# Altium PCB PCB1.PcbDoc
Units mm, origin at the board's own origin, x right, y up, seen from the top; angles counter-clockwise.
Board outline 51.75 x 40 mm, 2 copper layers (Top Layer, Bottom Layer); 26 components, 70 nets, 248 pads, 116 vias.
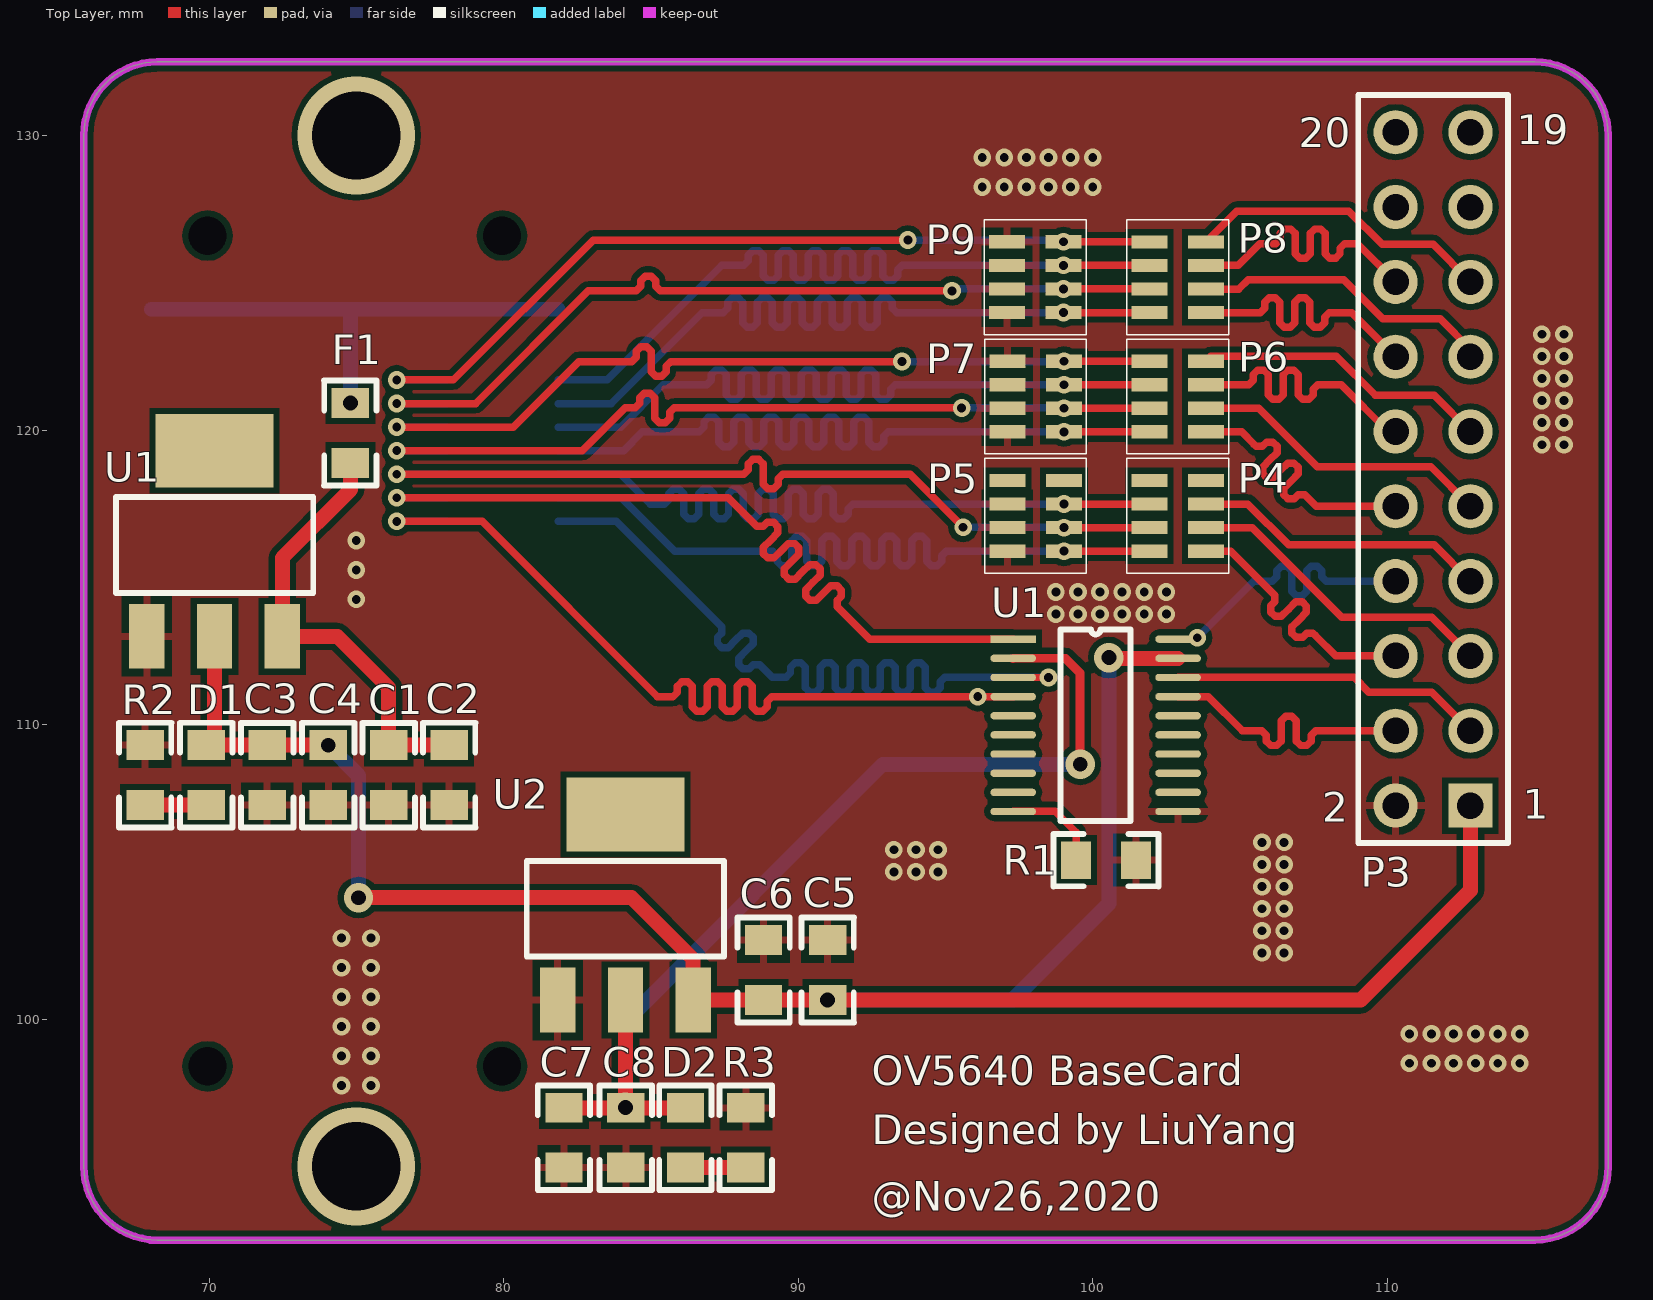
[diagram p0: Top Layer view]
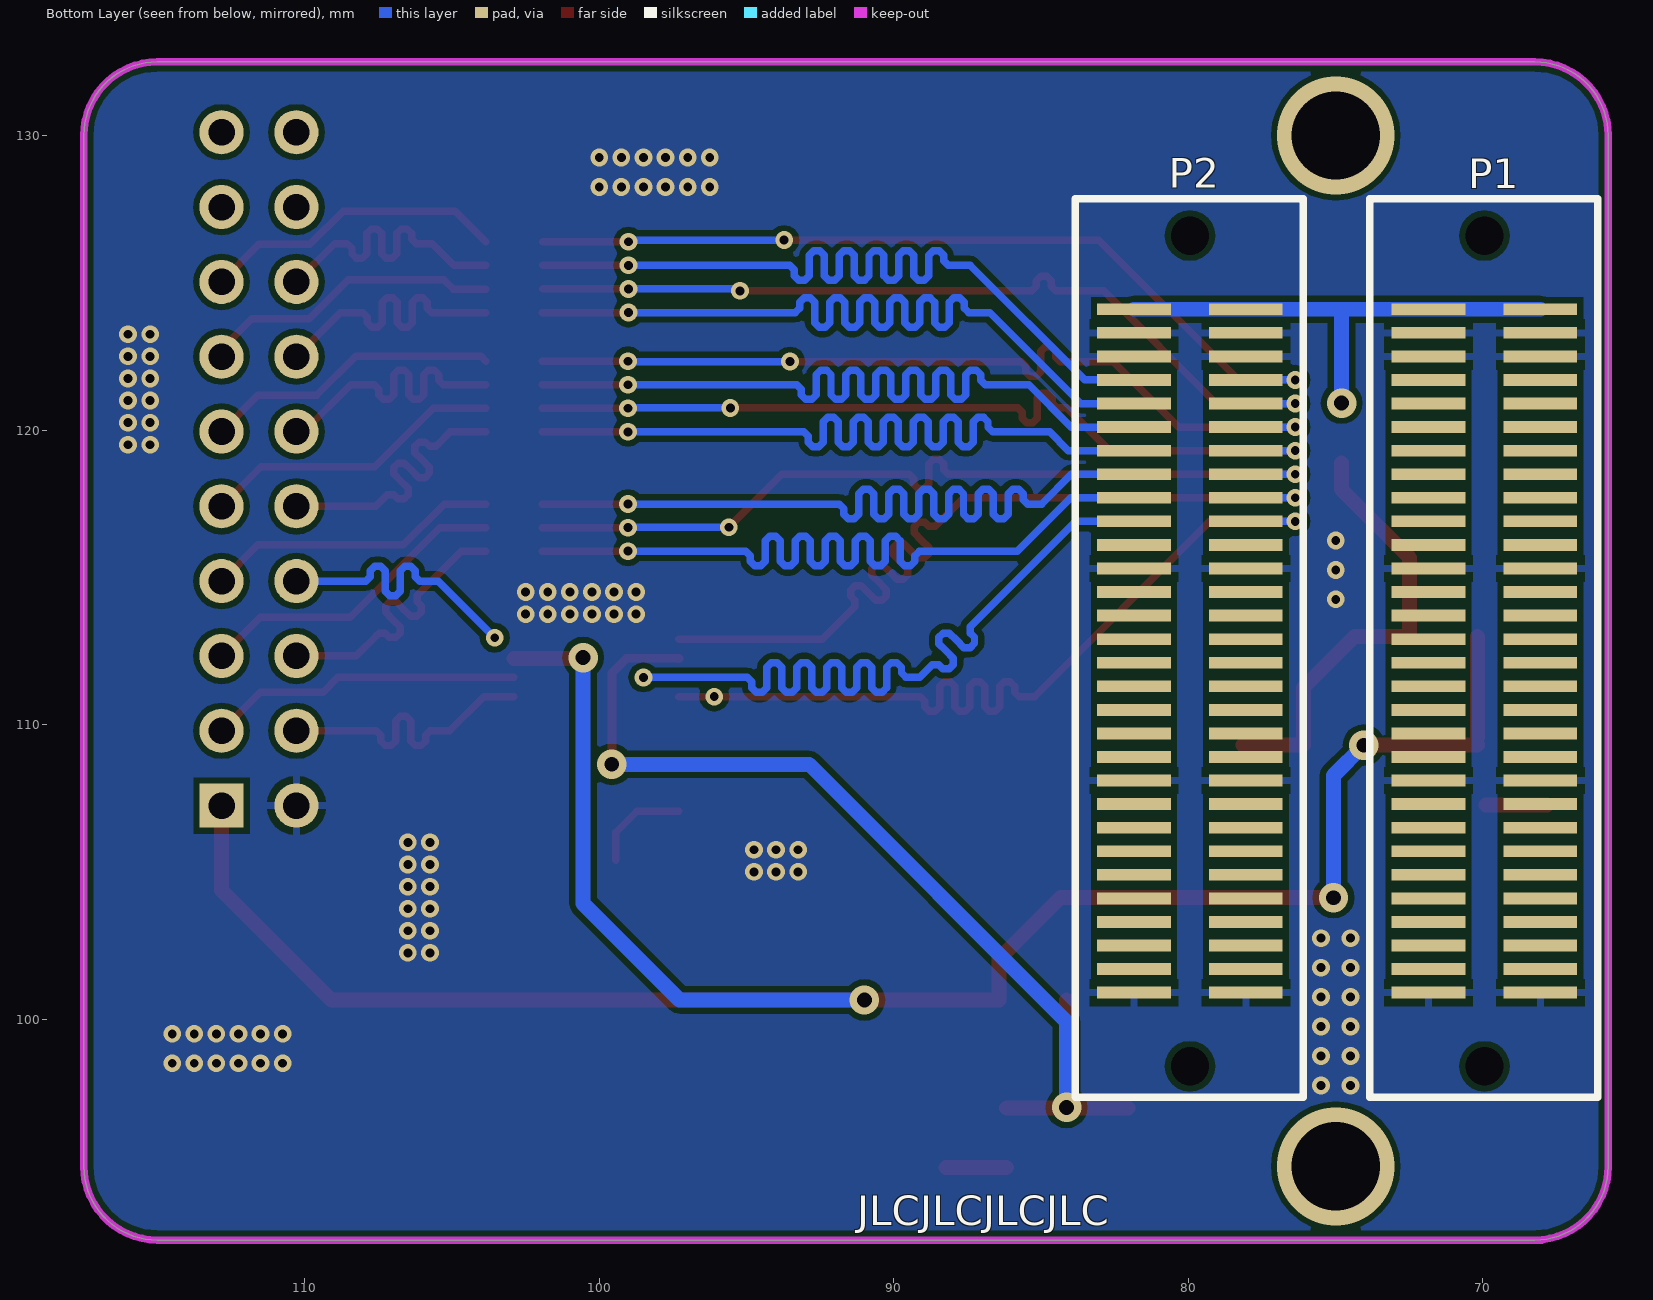
[diagram p1: Bottom Layer view, seen from below]
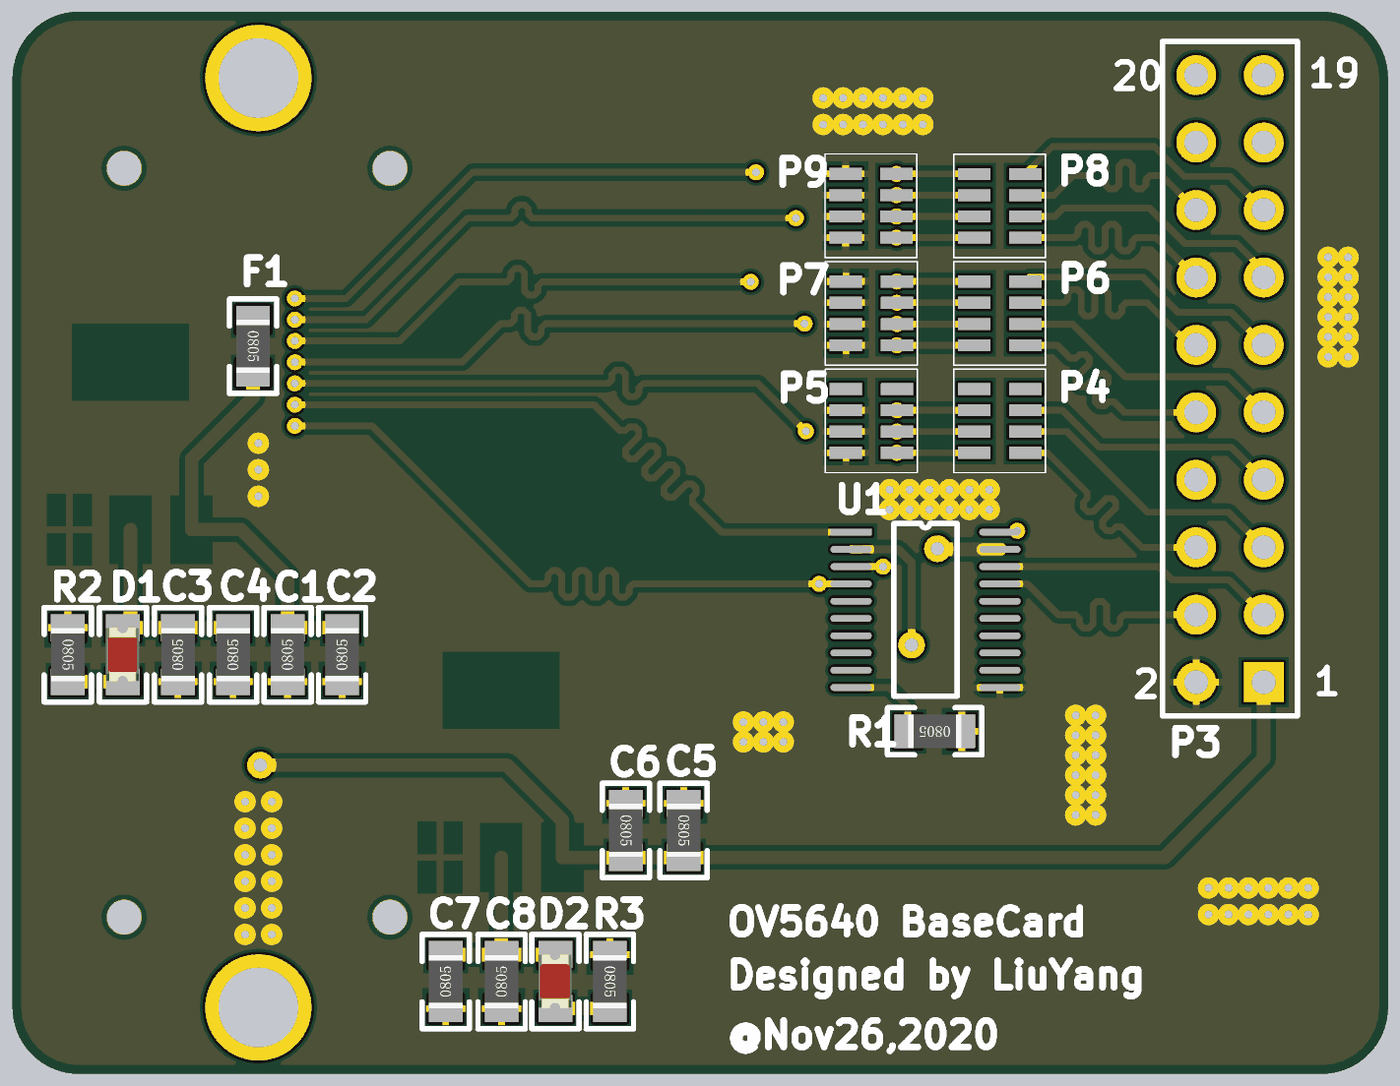
[diagram p2: 3D render of the assembled board from above, using the file's embedded part models]

## Layer stack, top to bottom
Top Solder: solder mask 0.0102, Solder Resist, Dk 3.5
Top Layer: signal copper 0.0356
Dielectric 1: dielectric 0.32, FR-4, Dk 4.8
Bottom Layer: signal copper 0.0356
Bottom Solder: solder mask 0.0102, Solder Resist, Dk 3.5

## Board outline
68.25,92.5 cw(c68.25,95) 65.75,95 65.75,130 cw(c68.25,130) 68.25,132.5 115,132.5 cw(c115,130) 117.5,130 117.5,95 cw(c115,95) 115,92.5

## Design rules (kind name [scope] priority, off if disabled: settings)
Clearance [All] p1: gap=0.2
Length Length_1 [InNetClass('Class2')] p1: maxlimit=31 minlimit=30
Length [InNetClass('Class1')] p2: maxlimit=11 minlimit=10
PolygonConnect [All] p1: connectstyle=Relief reliefconductorwidth=0.254 reliefentries=4 polygonreliefangle="90 Angle" airgapwidth=0.254
RoutingVias [All] p1: holewidth=0.3 width=0.6 viastyle="Through Hole" minholewidth=0.3 minwidth=0.6 maxholewidth=0.711 maxwidth=1.27
SolderMaskExpansion [All] p1: expansion=0.102
Width [All] p1: maxlimit=200 minlimit=0.2 preferedwidth=0.254
30 further rules are at their usual default settings.

## Components (designator, comment, footprint, x,y, rotation, side; value= is the part's Value field where it differs from the comment)
C1 "Cap" R0805 76.1,108.284 r90 top
C2 "Cap" R0805 78.15,108.284 r90 top
C3 "Cap" R0805 71.975,108.284 r90 top
C4 "Cap" R0805 74.05,108.284 r90 top
C5 "Cap" R0805 91,101.666 r270 top
C6 "Cap" R0805 88.825,101.666 r270 top
C7 "Cap" R0805 82.05,95.975 r90 top
C8 "Cap" R0805 84.15,95.975 r90 top
D1 "LED0" LED0805红 69.905,108.284 r270 top
D2 "LED0" LED0805红 86.175,95.975 r270 top
F1 "Fuse 1" R0805 74.8,119.9 r270 top
P1 "BTB" BTBCON_0.8mm_60P 71.85,124.1 r180 bottom locked
P2 "BTB" BTBCON_0.8mm_60P 81.85,124.1 r180 bottom locked
P3 "OV5640" HDR2X10 112.825,107.25 r90 top locked
P4 "Res 10K" 排阻(4位贴片) 103.8,115.9 r180 top
P5 "Res 12K" 排阻(4位贴片) 98.975,115.9 r180 top
P6 "Res 10K" 排阻(4位贴片) 103.8,119.95 r180 top
P7 "Res 12K" 排阻(4位贴片) 98.975,119.95 r180 top
P8 "Res 10K" 排阻(4位贴片) 103.8,124 r180 top
P9 "Res 12K" 排阻(4位贴片) 98.961,124.002 r180 top
R1 "Res Semi" R0805 100.45,105.4 r180 top
R2 "Res1" R0805 67.83,108.284 r270 top
R3 "Res1" R0805 88.225,95.975 r270 top
U1 "AMS1117-3V3" AMS1117 1294.9,1365.725 r0 top (schematic designator VR1)
U1 "TXB0108" TXB0108 97.3,112.9 r0 top
U2 "AMS1117-1V8" AMS1117 1308.85,1353.375 r0 top (schematic designator VR2)

## Footprints (in the part's own frame and the unit in brackets; to place one, negate y for a bottom-side part, rotate by r counter-clockwise, add the part's x,y. Pads: shape width x height; smd on the part's side, far side on the other; paste and mask are expansions set on the pad)
AMS1117 [mm]
  rect 1.2x2.2 smd: 1(-1227.012,-1252.729) 2(-1224.712,-1252.729) 3(-1222.412,-1252.729)
  rect 4x2.5 smd: 4(-1224.712,-1246.429)
  silkscreen extent -1228.06,-1251.25 -1221.36,-1248, body extent -1227.99,-1253.24 -1221.49,-1246.28, height 1.7
BTBCON_0.8mm_60P [mm]
  rect 2.5x0.4 smd: 1(0,0) 2(3.8,0) 3(0,-0.8) 4(3.8,-0.8) 5(0,-1.6) 6(3.8,-1.6) 7(0,-2.4) 8(3.8,-2.4) 9(0,-3.2) 10(3.8,-3.2) 11(0,-4) 12(3.8,-4) 13(0,-4.8) 14(3.8,-4.8) 15(0,-5.6) 16(3.8,-5.6) 17(0,-6.4) 18(3.8,-6.4) 19(0,-7.2) 20(3.8,-7.2) 21(0,-8) 22(3.8,-8) 23(0,-8.8) 24(3.8,-8.8) 25(0,-9.6) 26(3.8,-9.6) 27(0,-10.4) 28(3.8,-10.4) 29(0,-11.2) 30(3.8,-11.2) 31(0,-12) 32(3.8,-12) 33(0,-12.8) 34(3.8,-12.8) 35(0,-13.6) 36(3.8,-13.6) 37(0,-14.4) 38(3.8,-14.4) 39(0,-15.2) 40(3.8,-15.2) 41(0,-16) 42(3.8,-16) 43(0,-16.8) 44(3.8,-16.8) 45(0,-17.6) 46(3.8,-17.6) 47(0,-18.4) 48(3.8,-18.4) 49(0,-19.2) 50(3.8,-19.2) 51(0,-20) 52(3.8,-20) 53(0,-20.8) 54(3.8,-20.8) 55(0,-21.6) 56(3.8,-21.6) 57(0,-22.4) 58(3.8,-22.4) 59(0,-23.2) 60(3.8,-23.2)
  round 1 hole 1.3: 61(1.9,2.5) 62(1.9,-25.7)
  silkscreen extent -2,-26.75 5.75,3.75
HDR2X10 [mm] "Connector; Header; 10x2 Position"
  rect 1.5x1.5 hole 0.9: 1(0,0)
  round 1.5 hole 0.9: 2(0,2.54) 3(2.54,0) 4(2.54,2.54) 5(5.08,0) 6(5.08,2.54) 7(7.62,0) 8(7.62,2.54) 9(10.16,0) 10(10.16,2.54) 11(12.7,0) 12(12.7,2.54) 13(15.24,0) 14(15.24,2.54) 15(17.78,0) 16(17.78,2.54) 17(20.32,0) 18(20.32,2.54) 19(22.86,0) 20(22.86,2.54)
  silkscreen extent -1.27,-1.27 24.13,3.81
LED0805红 [mil]
  rect 40x50 smd: 1(-40,0) 2(40,0)
  silkscreen extent -70,-35 70,35, body extent -40,-25 40,24, height 43
R0805 [mil]
  rect 40x50 smd: 1(-40,0) 2(40,0)
  silkscreen extent -70,-35 70,35, body extent -39,-25 39,25, height 22
TXB0108 [mm]
  rect 1.55x0.25 smd: 1(0,0)
  oval 1.55x0.25 smd: 2(0,-0.65) 3(0,-1.3) 4(0,-1.95) 5(0,-2.6) 6(0,-3.25) 7(0,-3.9) 8(0,-4.55) 9(0,-5.2) 10(0,-5.85) 11(5.6,-5.85) 12(5.6,-5.2) 13(5.6,-4.55) 14(5.6,-3.9) 15(5.6,-3.25) 16(5.6,-2.6) 17(5.6,-1.95) 18(5.6,-1.3) 19(5.6,-0.65) 20(5.6,0)
  silkscreen extent 1.61,-6.18 3.99,0.33
排阻(4位贴片) [mm]
  rect 1.22x0.45 smd: 1(-0.051,0.013) 2(1.869,0.013) 3(-0.051,-0.787) 4(1.869,-0.787) 5(-0.051,-1.587) 6(1.869,-1.587) 7(-0.051,-2.387) 8(1.869,-2.387)
  silkscreen extent -0.81,-3.14 2.64,0.76, body extent 0.1,-2.79 1.7,0.41, height 0.59

## Part data
C1 C2 C3 C4 C5 C6 C7 C8: "Capacitor"
D1 D2: "Typical INFRARED GaAs LED"
F1: "Fuse"
P1 P2: library part "Header 30X2", "Header, 30-Pin, Dual row"
P3: library part "Header 10X2", "Header, 10-Pin, Dual row"
P4 P5 P6 P7 P8 P9: library part "Header 4X2", "Header, 4-Pin, Dual row"
R1: "Semiconductor Resistor"
R2 R3: "Resistor"
U1 U2: library part "Volt Reg", "Voltage Regulator"

## Via types
v1: diameter 0.6, hole 0.3, Top Layer to Bottom Layer, 107 vias
v2: diameter 1, hole 0.5, Top Layer to Bottom Layer, 7 vias
v3: diameter 4, hole 3, Top Layer to Bottom Layer, 2 vias

## Nets (pads, with @x,y where several pads share a name; then routed paths per layer and width w, separated by ;. In a path a pad name is that pad's centre, name@x,y a point inside that pad or via, vN(x,y) a via of type N, cw(c..) or ccw(c..) an arc to the next point about the centre after c; other vN are vias at no path point)
1V8: C7.2 C8.2 D2.1 U1.2@97.3,112.25 U2.2 | length 35.3
  Top Layer w0.305: U1.2@97.3,112.25 97.3,112.252 99.073,112.252 99.575,111.75 v2(99.575,108.65)
  Top Layer w0.508: C7.2 C8.2 ; U2.2 v2(84.138,97.003) C8.2 ; D2.1 C8.2
  Bottom Layer w0.508: v2(84.138,97.003) 84.138,99.913 92.875,108.65 v2(99.575,108.65)
3V3: C3.2 C4.2 C5.2 C6.2 D1.1 P3.1 U1.2@70.188,112.996 U1.19 U2.3 | length 79.1
  Top Layer w0.508: D1.1@70.188,109.3 v2(74.05,109.3) ; D1.1@70.188,109.583 U1.2@70.188,112.996 ; v2(75.075,104.125) 84.35,104.125 86.438,102.037 U2.3 88.821,100.646 C6.2 v2(91,100.65) 109.1,100.65 112.825,104.375 P3.1 ; v2(100.55,112.275) 100.5,112.275 100.475,112.25 U1.19
  Bottom Layer w0.508: v2(74.05,109.3) 75.075,108.275 v2(75.075,104.125) ; v2(91,100.65) 97.275,100.65 100.55,103.925 v2(100.55,112.275)
5V: F1.1 P1.1 P1.2 P2.1 P2.2 | length 17
  Bottom Layer w0.508: P1.2 P1.1 74.825,124.1 ; v2(74.8,120.916) 74.8,124.075 74.825,124.1 ; P2.1 P2.2 74.825,124.1
A12: P2.46
A13: P2.44
A14: P2.39
A15: P2.37
A16: P2.18 U1.1@97.3,112.9 | length 30.2
  Top Layer w0.254: v1(76.373,117.7) 87.625,117.7 88.525,116.8 88.597,116.728 88.812,116.728 88.95,116.866 89.166,116.866 89.31,116.722 89.31,116.507 89.064,116.261 88.818,116.015 88.818,115.8 88.962,115.656 89.177,115.656 89.423,115.902 89.669,116.148 89.884,116.148 90.028,116.004 90.028,115.789 89.782,115.543 89.536,115.297 89.536,115.081 89.68,114.938 89.896,114.938 90.141,115.184 90.387,115.429 90.603,115.429 90.746,115.286 90.746,115.07 90.501,114.824 90.255,114.579 90.255,114.363 90.399,114.219 90.614,114.219 90.86,114.465 91.106,114.711 91.321,114.711 91.465,114.567 91.465,114.352 91.327,114.214 91.327,113.998 91.5,113.825 92.425,112.9 U1.1@97.3,112.9
  Bottom Layer w0.254: v1(76.373,117.7) 76.595,117.7 P2.18
A17: P2.16 P4.4 P5.3 | length 29.4
  Top Layer w0.254: v1(76.373,118.5) 88.05,118.5 88.152,118.5 88.304,118.652 88.304,118.848 88.456,119 88.66,119 88.812,118.848 88.812,118.5 88.812,118.152 88.964,118 89.168,118 89.32,118.152 89.32,118.348 89.472,118.5 89.675,118.5 93.8,118.5 v1(95.6,116.7) ; v1(99.026,116.687) P4.4
  Bottom Layer w0.254: v1(76.373,118.5) 76.595,118.5 P2.16 ; v1(95.6,116.7) 99.013,116.7 v1(99.026,116.687)
B13: P2.45
B14: P2.43
B15: P2.36
B16: P2.34
C12: P2.40
C13: P2.38
C16: P2.32
C17: P2.28
D0: P3.16 P8.5 | length 10.4
  Top Layer w0.254: P8.5 104.937,125.587 105.675,126.325 106.1,126.325 106.212,126.325 106.364,126.477 106.364,126.673 106.516,126.825 106.72,126.825 106.872,126.673 106.872,126.325 106.872,125.977 107.024,125.825 107.228,125.825 107.38,125.977 107.38,126.325 107.38,126.673 107.532,126.825 107.736,126.825 107.888,126.673 107.888,126.325 107.888,125.977 108.04,125.825 108.244,125.825 108.396,125.977 108.396,126.173 108.548,126.325 108.65,126.325 108.99,126.325 P3.16
D1: P3.15 P8.7 | length 10.4
  Top Layer w0.254: P8.7 104.888,127.425 108.7,127.425 109.825,126.3 111.555,126.3 P3.15
D2: P3.14 P8.1 | length 10.2
  Top Layer w0.254: P8.1 105.45,123.987 105.687,123.987 105.839,124.14 105.839,124.335 105.991,124.487 106.195,124.487 106.347,124.335 106.347,123.987 106.347,123.64 106.499,123.487 106.703,123.487 106.855,123.64 106.855,123.987 106.855,124.335 107.007,124.487 107.211,124.487 107.363,124.335 107.363,123.987 107.363,123.64 107.515,123.487 107.719,123.487 107.871,123.64 107.871,123.835 108.023,123.987 108.125,123.987 108.788,123.987 P3.14
D3: P3.13 P8.3 | length 10.3
  Top Layer w0.254: P8.3 104.962,124.787 105.275,125.1 108.525,125.1 109.85,123.775 111.8,123.775 112.825,122.75 P3.13
D4: P3.12 P6.5 | length 10.2
  Top Layer w0.254: P6.5 105.2,121.537 105.302,121.537 105.454,121.69 105.454,121.885 105.606,122.037 105.81,122.037 105.962,121.885 105.962,121.537 105.962,121.19 106.114,121.037 106.318,121.037 106.47,121.19 106.47,121.537 106.47,121.885 106.622,122.037 106.826,122.037 106.978,121.885 106.978,121.537 106.978,121.19 107.13,121.037 107.334,121.037 107.486,121.19 107.486,121.385 107.638,121.537 108.025,121.537 108.438,121.537 110.025,119.95 P3.12
D5: P3.11 P6.7 | length 10.1
  Top Layer w0.254: P6.7 104.013,122.5 108.275,122.5 109.6,121.175 111.6,121.175 P3.11
D6: P3.10 P6.1 | length 10.6
  Top Layer w0.254: P6.1 105.063,119.937 105.475,119.525 105.547,119.453 105.762,119.453 105.9,119.591 106.116,119.591 106.26,119.448 106.26,119.232 106.014,118.986 105.768,118.74 105.768,118.525 105.912,118.381 106.127,118.381 106.373,118.627 106.619,118.873 106.834,118.873 106.978,118.729 106.978,118.514 106.732,118.268 106.486,118.022 106.486,117.806 106.63,117.663 106.846,117.663 106.984,117.801 107.199,117.801 107.263,117.738 107.59,117.41 P3.10
D7: P3.9 P6.3 | length 10.4
  Top Layer w0.254: P6.3 105.638,120.737 107.625,118.75 111.485,118.75 P3.9
D14: P2.50
D15: P2.48
D16: P2.30
D17: P2.26
E14: P2.31
E15: P2.29
E17: P2.14 P6.4 P7.3 | length 29.3
  Top Layer w0.254: v1(76.373,119.3) 82.675,119.3 84.125,120.75 84.375,120.75 84.477,120.75 84.629,120.902 84.629,121.098 84.781,121.25 84.985,121.25 85.137,121.098 85.137,120.75 85.137,120.402 85.289,120.25 85.493,120.25 85.645,120.402 85.645,120.598 85.797,120.75 86.775,120.75 v1(95.55,120.75) ; v1(99.026,120.737) P6.4
  Bottom Layer w0.254: v1(76.373,119.3) P2.14 ; v1(95.55,120.75) 99.013,120.75 v1(99.026,120.737)
E18: P2.12 P6.8 P7.7 | length 29.6
  Top Layer w0.254: v1(76.373,120.1) 80.325,120.1 82.55,122.325 84.25,122.325 84.352,122.325 84.504,122.477 84.504,122.673 84.656,122.825 84.86,122.825 85.012,122.673 85.012,122.325 85.012,121.977 85.164,121.825 85.368,121.825 85.52,121.977 85.52,122.173 85.672,122.325 87.025,122.325 v1(93.525,122.325) ; v1(99.026,122.337) P6.8
  Bottom Layer w0.254: v1(76.373,120.1) 76.595,120.1 P2.12 ; v1(93.525,122.325) 99.013,122.325 v1(99.026,122.337)
F13: P2.54
F15: P2.22
F16: P2.35
F17: P2.33
F18: P2.13 P6.2 P7.1 | length 30
  Top Layer w0.254: v1(99.026,119.937) P6.2
  Bottom Layer w0.254: P2.13 84.075,119.3 84.712,119.937 86.55,119.937 86.652,119.937 86.804,120.09 86.804,120.285 86.956,120.437 87.16,120.437 87.312,120.285 87.312,119.937 87.312,119.59 87.464,119.437 87.668,119.437 87.82,119.59 87.82,119.937 87.82,120.285 87.972,120.437 88.176,120.437 88.328,120.285 88.328,119.937 88.328,119.59 88.48,119.437 88.684,119.437 88.836,119.59 88.836,119.937 88.836,120.285 88.988,120.437 89.192,120.437 89.344,120.285 89.344,119.937 89.344,119.59 89.496,119.437 89.7,119.437 89.852,119.59 89.852,119.937 89.852,120.285 90.004,120.437 90.208,120.437 90.36,120.285 90.36,119.937 90.36,119.59 90.512,119.437 90.716,119.437 90.868,119.59 90.868,119.937 90.868,120.285 91.02,120.437 91.224,120.437 91.376,120.285 91.376,119.937 91.376,119.59 91.528,119.437 91.732,119.437 91.884,119.59 91.884,119.937 91.884,120.285 92.036,120.437 92.24,120.437 92.392,120.285 92.392,119.937 92.392,119.59 92.544,119.437 92.748,119.437 92.9,119.59 92.9,119.785 93.052,119.937 95.075,119.937 v1(99.026,119.937)
G14: P2.52
G15: P2.20 U1.4@97.3,110.95 | length 29.8
  Top Layer w0.25: v1@96.32,110.95 U1.4@97.3,110.95
  Top Layer w0.254: v1(76.373,116.9) 79.275,116.9 85.225,110.95 85.65,110.95 85.752,110.95 85.904,111.102 85.904,111.298 86.056,111.45 86.26,111.45 86.412,111.298 86.412,110.95 86.412,110.602 86.564,110.45 86.768,110.45 86.92,110.602 86.92,110.95 86.92,111.298 87.072,111.45 87.276,111.45 87.428,111.298 87.428,110.95 87.428,110.602 87.58,110.45 87.784,110.45 87.936,110.602 87.936,110.95 87.936,111.298 88.088,111.45 88.292,111.45 88.444,111.298 88.444,110.95 88.444,110.602 88.596,110.45 88.8,110.45 88.952,110.602 88.952,110.798 89.104,110.95 89.325,110.95 v1(96.098,110.95) v1@96.32,110.95
  Bottom Layer w0.254: v1(76.373,116.9) 76.595,116.9 P2.20
G16: P2.10 P8.4 P9.3 | length 29.5
  Top Layer w0.254: v1(76.373,120.9) 79.05,120.9 82.875,124.725 84.4,124.725 84.502,124.725 84.654,124.877 84.654,125.073 84.806,125.225 85.01,125.225 85.162,125.073 85.162,124.877 85.314,124.725 85.525,124.725 v1(95.225,124.725) ; v1(99.012,124.789) P8.4@101.929,124.789
  Bottom Layer w0.254: v1(76.373,120.9) 76.595,120.9 P2.10 ; v1(95.225,124.725) 95.289,124.789 v1(99.012,124.789)
G18: P2.11 P6.6 P7.5 | length 30.4
  Top Layer w0.254: v1(99.026,121.537) P6.6
  Bottom Layer w0.254: P2.11 83.975,120.1 85.412,121.537 86.8,121.537 86.902,121.537 87.054,121.69 87.054,121.885 87.206,122.037 87.41,122.037 87.562,121.885 87.562,121.537 87.562,121.19 87.714,121.037 87.918,121.037 88.07,121.19 88.07,121.537 88.07,121.885 88.222,122.037 88.426,122.037 88.578,121.885 88.578,121.537 88.578,121.19 88.73,121.037 88.934,121.037 89.086,121.19 89.086,121.537 89.086,121.885 89.238,122.037 89.442,122.037 89.594,121.885 89.594,121.537 89.594,121.19 89.746,121.037 89.95,121.037 90.102,121.19 90.102,121.537 90.102,121.885 90.254,122.037 90.458,122.037 90.61,121.885 90.61,121.537 90.61,121.19 90.762,121.037 90.966,121.037 91.118,121.19 91.118,121.537 91.118,121.885 91.27,122.037 91.474,122.037 91.626,121.885 91.626,121.537 91.626,121.19 91.778,121.037 91.982,121.037 92.134,121.19 92.134,121.537 92.134,121.885 92.286,122.037 92.49,122.037 92.642,121.885 92.642,121.537 92.642,121.19 92.794,121.037 92.998,121.037 93.15,121.19 93.15,121.385 93.302,121.537 93.5,121.537 v1(99.026,121.537)
G19: P2.9 P8.2 P9.1 | length 30.2
  Top Layer w0.254: v1(99.012,123.989) 101.929,123.989 P8.2
  Bottom Layer w0.254: P2.9 83.65,120.9 86.739,123.989 87.35,123.989 87.452,123.989 87.604,124.142 87.604,124.337 87.756,124.489 87.96,124.489 88.112,124.337 88.112,123.989 88.112,123.642 88.264,123.489 88.468,123.489 88.62,123.642 88.62,123.989 88.62,124.337 88.772,124.489 88.976,124.489 89.128,124.337 89.128,123.989 89.128,123.642 89.28,123.489 89.484,123.489 89.636,123.642 89.636,123.989 89.636,124.337 89.788,124.489 89.992,124.489 90.144,124.337 90.144,123.989 90.144,123.642 90.296,123.489 90.5,123.489 90.652,123.642 90.652,123.989 90.652,124.337 90.804,124.489 91.008,124.489 91.16,124.337 91.16,123.989 91.16,123.642 91.312,123.489 91.516,123.489 91.668,123.642 91.668,123.989 91.668,124.337 91.82,124.489 92.024,124.489 92.176,124.337 92.176,123.989 92.176,123.642 92.328,123.489 92.532,123.489 92.684,123.642 92.684,123.989 92.684,124.337 92.836,124.489 93.04,124.489 93.192,124.337 93.192,124.142 93.344,123.989 94.075,123.989 v1(99.012,123.989)
GND: C1.1 C2.1 C3.1 C4.1 C5.1 C6.1 C7.1 C8.1 P1.3 P1.4 P1.5 P1.6 P1.23 P1.24 P1.41 P1.42 P1.59 P1.60 P2.3 P2.4 P2.5 P2.6 P2.23 P2.24 P2.41 P2.42 P2.59 P2.60 P3.2 P5.2 P5.4 P5.6 P7.2 P7.4 P7.6 P7.8 P9.2 P9.4 P9.6 P9.8 R1.1 R2.1 R3.1 U1.1@67.888,112.996 U1.11 U2.1
  other v1: 74.5,97.75 75.5,97.75 110.75,98.5 111.5,98.5 112.25,98.5 113,98.5 113.75,98.5 114.5,98.5 74.5,98.75 75.5,98.75 110.75,99.5 111.5,99.5 112.25,99.5 113,99.5 113.75,99.5 114.5,99.5 74.5,99.75 75.5,99.75 74.5,100.75 75.5,100.75 74.5,101.75 75.5,101.75 105.75,102.25 106.5,102.25 74.5,102.75 75.5,102.75 105.75,103 106.5,103 105.75,103.75 106.5,103.75 105.75,104.5 106.5,104.5 93.25,105 94,105 94.75,105 105.75,105.25 106.5,105.25 93.25,105.75 94,105.75 94.75,105.75 105.75,106 106.5,106 98.75,113.75 99.5,113.75 100.25,113.75 101,113.75 101.75,113.75 102.5,113.75 75,114.25 98.75,114.5 99.5,114.5 100.25,114.5 101,114.5 101.75,114.5 102.5,114.5 75,115.25 75,116.25 115.25,119.5 116,119.5 115.25,120.25 116,120.25 115.25,121 116,121 115.25,121.75 116,121.75 115.25,122.5 116,122.5 115.25,123.25 116,123.25 96.25,128.25 97,128.25 97.75,128.25 98.5,128.25 99.25,128.25 100,128.25 96.25,129.25 97,129.25 97.75,129.25 98.5,129.25 99.25,129.25 100,129.25
H16: P2.8 P8.8 P9.7 | length 29.2
  Top Layer w0.254: v1(76.373,121.7) 78.3,121.7 83.05,126.45 v1(93.725,126.45) ; v1(99.012,126.389) P8.8@101.929,126.389
  Bottom Layer w0.254: v1(76.373,121.7) 76.595,121.7 P2.8 ; v1(93.725,126.45) 98.951,126.45 v1(99.012,126.389)
H17: P2.21
H18: P2.19 U1.3@97.3,111.6 | length 30.4
  Top Layer w0.25: U1.3@97.3,111.6 v1@98.28,111.6
  Top Layer w0.254: v1@98.28,111.6 v1(98.502,111.6)
  Bottom Layer w0.254: P2.19 83.825,116.9 86.687,114.038 87.401,113.324 87.401,113.109 87.263,112.971 87.263,112.755 87.406,112.611 87.622,112.611 87.868,112.857 88.114,113.103 88.329,113.103 88.473,112.959 88.473,112.744 88.227,112.498 87.981,112.252 87.981,112.037 88.125,111.893 88.34,111.893 88.478,112.031 88.694,112.031 88.945,111.78 89.125,111.6 89.233,111.6 89.589,111.6 89.741,111.752 89.741,111.948 89.893,112.1 90.097,112.1 90.249,111.948 90.249,111.6 90.249,111.252 90.401,111.1 90.605,111.1 90.757,111.252 90.757,111.6 90.757,111.948 90.909,112.1 91.113,112.1 91.265,111.948 91.265,111.6 91.265,111.252 91.417,111.1 91.621,111.1 91.773,111.252 91.773,111.6 91.773,111.948 91.925,112.1 92.129,112.1 92.281,111.948 92.281,111.6 92.281,111.252 92.433,111.1 92.637,111.1 92.789,111.252 92.789,111.6 92.789,111.948 92.941,112.1 93.145,112.1 93.297,111.948 93.297,111.6 93.297,111.252 93.449,111.1 93.653,111.1 93.805,111.252 93.805,111.6 93.805,111.948 93.957,112.1 94.161,112.1 94.313,111.948 94.313,111.6 94.313,111.252 94.465,111.1 94.669,111.1 94.821,111.252 94.821,111.448 94.973,111.6 95.075,111.6 v1(98.502,111.6)
H19: P2.7 P8.6 P9.5 | length 29.7
  Top Layer w0.254: v1(99.012,125.589) P8.6@101.929,125.589
  Bottom Layer w0.254: P2.7 83.525,121.7 87.414,125.589 88.05,125.589 88.152,125.589 88.304,125.742 88.304,125.937 88.456,126.089 88.66,126.089 88.812,125.937 88.812,125.589 88.812,125.242 88.964,125.089 89.168,125.089 89.32,125.242 89.32,125.589 89.32,125.937 89.472,126.089 89.676,126.089 89.828,125.937 89.828,125.589 89.828,125.242 89.98,125.089 90.184,125.089 90.336,125.242 90.336,125.589 90.336,125.937 90.488,126.089 90.692,126.089 90.844,125.937 90.844,125.589 90.844,125.242 90.996,125.089 91.2,125.089 91.352,125.242 91.352,125.589 91.352,125.937 91.504,126.089 91.708,126.089 91.86,125.937 91.86,125.589 91.86,125.242 92.012,125.089 92.216,125.089 92.368,125.242 92.368,125.589 92.368,125.937 92.52,126.089 92.724,126.089 92.876,125.937 92.876,125.589 92.876,125.242 93.028,125.089 93.232,125.089 93.384,125.242 93.384,125.437 93.536,125.589 93.65,125.589 v1(99.012,125.589)
HS: P3.6 P4.1 | length 10.2
  Top Layer w0.254: P4.1 104.688,115.887 105.688,114.888 106.185,114.39 106.185,114.174 106.047,114.036 106.047,113.821 106.191,113.677 106.406,113.677 106.652,113.923 106.898,114.169 107.113,114.169 107.257,114.025 107.257,113.81 107.011,113.564 106.765,113.318 106.765,113.103 106.909,112.959 107.125,112.959 107.263,113.097 107.478,113.097 107.55,113.025 108.245,112.33 P3.6
J15: P2.58
J16: P2.56
J17: P2.17 P4.2 P5.1 | length 29.7
  Top Layer w0.254: v1(99.026,115.887) P4.2
  Bottom Layer w0.254: P2.17 84,117.7 85.813,115.887 88.818,115.887 89.131,115.887 89.283,115.735 89.283,115.54 89.435,115.387 89.639,115.387 89.791,115.54 89.791,115.887 89.791,116.235 89.943,116.387 90.147,116.387 90.299,116.235 90.299,115.887 90.299,115.54 90.451,115.387 90.655,115.387 90.807,115.54 90.807,115.887 90.807,116.235 90.959,116.387 91.163,116.387 91.315,116.235 91.315,115.887 91.315,115.54 91.467,115.387 91.671,115.387 91.823,115.54 91.823,115.887 91.823,116.235 91.975,116.387 92.179,116.387 92.331,116.235 92.331,115.887 92.331,115.54 92.483,115.387 92.687,115.387 92.839,115.54 92.839,115.887 92.839,116.235 92.991,116.387 93.195,116.387 93.347,116.235 93.347,115.887 93.347,115.54 93.499,115.387 93.703,115.387 93.855,115.54 93.855,115.887 93.855,116.235 94.007,116.387 94.211,116.387 94.363,116.235 94.363,115.887 94.363,115.54 94.515,115.387 94.719,115.387 94.871,115.54 94.871,115.735 95.023,115.887 95.125,115.887 v1(99.026,115.887)
K15: P2.57
K17: P2.15 P4.6 P5.5 | length 30.2
  Top Layer w0.254: v1(99.026,117.487) P4.6
  Bottom Layer w0.254: P2.15 83.975,118.5 84.988,117.487 85.35,117.487 85.452,117.487 85.604,117.64 85.604,117.835 85.756,117.987 85.96,117.987 86.112,117.835 86.112,117.487 86.112,117.14 86.264,116.987 86.468,116.987 86.62,117.14 86.62,117.487 86.62,117.835 86.772,117.987 86.976,117.987 87.128,117.835 87.128,117.487 87.128,117.14 87.28,116.987 87.484,116.987 87.636,117.14 87.636,117.487 87.636,117.835 87.788,117.987 87.992,117.987 88.144,117.835 88.144,117.487 88.144,117.14 88.296,116.987 88.5,116.987 88.652,117.14 88.652,117.487 88.652,117.835 88.804,117.987 89.008,117.987 89.16,117.835 89.16,117.487 89.16,117.14 89.312,116.987 89.516,116.987 89.668,117.14 89.668,117.487 89.668,117.835 89.82,117.987 90.024,117.987 90.176,117.835 90.176,117.487 90.176,117.14 90.328,116.987 90.532,116.987 90.684,117.14 90.684,117.487 90.684,117.835 90.836,117.987 91.04,117.987 91.192,117.835 91.192,117.487 91.192,117.14 91.344,116.987 91.548,116.987 91.7,117.14 91.7,117.335 91.852,117.487 92.4,117.487 v1(99.026,117.487)
K18: P2.53
K19: P2.51
K20: P2.49
L15: P2.55
L16: P2.27
L17: P2.25
L20: P2.47
NetC1_2: C1.2 C2.2 F1.2 U1.3@72.488,112.996 | length 15.2
  Top Layer w0.508: F1.2 74.8,117.975 72.488,115.663 72.488,112.996 74.354,112.996 76.1,111.25 C1.2 C2.2@78.15,109.3
NetD1_2: D1.2 R2.2 | length 2.1
  Top Layer w0.508: R2.2 D1.2
NetD2_2: D2.2 R3.2 | length 2.1
  Top Layer w0.508: D2.2 R3.2
NetR1_2: R1.2 U1.10 | length 3.4
  Top Layer w0.254: U1.10 98.725,107.05 99.434,106.341 R1.2
PCK: P3.7 P4.5 | length 10.1
  Top Layer w0.254: P4.5 105.263,117.487 106.65,116.1 111.595,116.1 P3.7
SCK: P3.3 U1.18 | length 10.7
  Top Layer w0.254: U1.18 108.875,111.6 109.375,111.1 111.515,111.1 P3.3
SDA: P3.4 U1.17 | length 10.2
  Top Layer w0.254: U1.17 103.925,110.95 105.085,109.79 105.375,109.79 105.745,109.79 105.897,109.638 105.897,109.442 106.049,109.29 106.253,109.29 106.405,109.442 106.405,109.79 106.405,110.138 106.557,110.29 106.761,110.29 106.913,110.138 106.913,109.79 106.913,109.442 107.065,109.29 107.269,109.29 107.421,109.442 107.421,109.638 107.573,109.79 107.675,109.79 P3.4
VS: P3.5 P4.3 | length 10.8
  Top Layer w0.254: P4.3 105.421,116.687 108.458,113.65 111.505,113.65 P3.5
XCK: P3.8 U1.20 | length 9.8
  Bottom Layer w0.254: v1(103.55,112.95) 105.47,114.87 106,114.87 106.102,114.87 106.254,115.022 106.254,115.218 106.406,115.37 106.61,115.37 106.762,115.218 106.762,114.87 106.762,114.522 106.914,114.37 107.118,114.37 107.27,114.522 107.27,114.87 107.27,115.218 107.422,115.37 107.626,115.37 107.778,115.218 107.778,115.022 107.93,114.87 108.3,114.87 P3.8
pads on no net: P1.7 P1.8 P1.9 P1.10 P1.11 P1.12 P1.13 P1.14 P1.15 P1.16 P1.17 P1.18 P1.19 P1.20 P1.21 P1.22 P1.25 P1.26 P1.27 P1.28 P1.29 P1.30 P1.31 P1.32 P1.33 P1.34 P1.35 P1.36 P1.37 P1.38 P1.39 P1.40 P1.43 P1.44 P1.45 P1.46 P1.47 P1.48 P1.49 P1.50 P1.51 P1.52 P1.53 P1.54 P1.55 P1.56 P1.57 P1.58 P1.61 P1.62 P2.61 P2.62 P3.17 P3.18 P3.19 P3.20 P4.7 P4.8 P5.7 P5.8 U1.4@70.188,119.296 U1.5 U1.6 U1.7 U1.8 U1.9 U1.12 U1.13 U1.14 U1.15 U1.16 U2.4
copper on no net:
  other v3: 75,95 75,130

## Polygon pours and split planes (outlines as drawn)
GND on Top Layer "Top Layer-No Net" (solid, remove dead copper, pour order 0): 64.25,133.75 62.75,132.25 62.75,89.25 125.5,89.25 126.75,90.5 121.75,95.5 121.75,135.25
GND on Bottom Layer "Top Layer-No Net" (solid, remove dead copper, pour order 2): 64,134.25 122,134.25 122.75,133.5 119.25,130 119.25,90.75 63.25,90.75 63,90.5

## Keep-outs
Keep-Out Layer:
  lines w0.254: 68,92.5 115,92.5 ccw(c115,95) 117.5,95 117.5,130 ccw(c115,130) 115,132.5 68.25,132.5 ccw(c68.25,130) 65.75,130 65.75,95 ccw(c68.25,95) 68.25,92.5

## Silkscreen, mask and mechanical layers (free items; w line width, h text height)
Top Overlay:
  text "OV5640 BaseCard" at 92.5,97.75 h1
  text "Designed by LiuYang" at 92.5,95.75 h1
  text "@Nov26,2020" at 92.5,93.5 h1
Bottom Overlay:
  text "JLCJLCJLCJLC" at 91.25,93 h1
Mechanical 1:
  lines w0.254: 65.75,95 ccw(c68.25,95) 68.25,92.5 93.75,92.5 115,92.5 ccw(c115,95) 117.5,95 117.5,130 ccw(c115,130) 115,132.5 94.75,132.5 68.25,132.5 ccw(c68.25,130) 65.75,130 65.75,95

## Text inside footprints (layer, text, board x,y; h text height)
P3: Top Overlay "20" at 107,129.6 h1; Top Overlay "19" at 114.4,129.7 h1; Top Overlay "1" at 114.6,106.8 h1; Top Overlay "2" at 107.8,106.7 h1